# EAGLE board BMS-Shield rev0 (EAGLE 8.0.2)
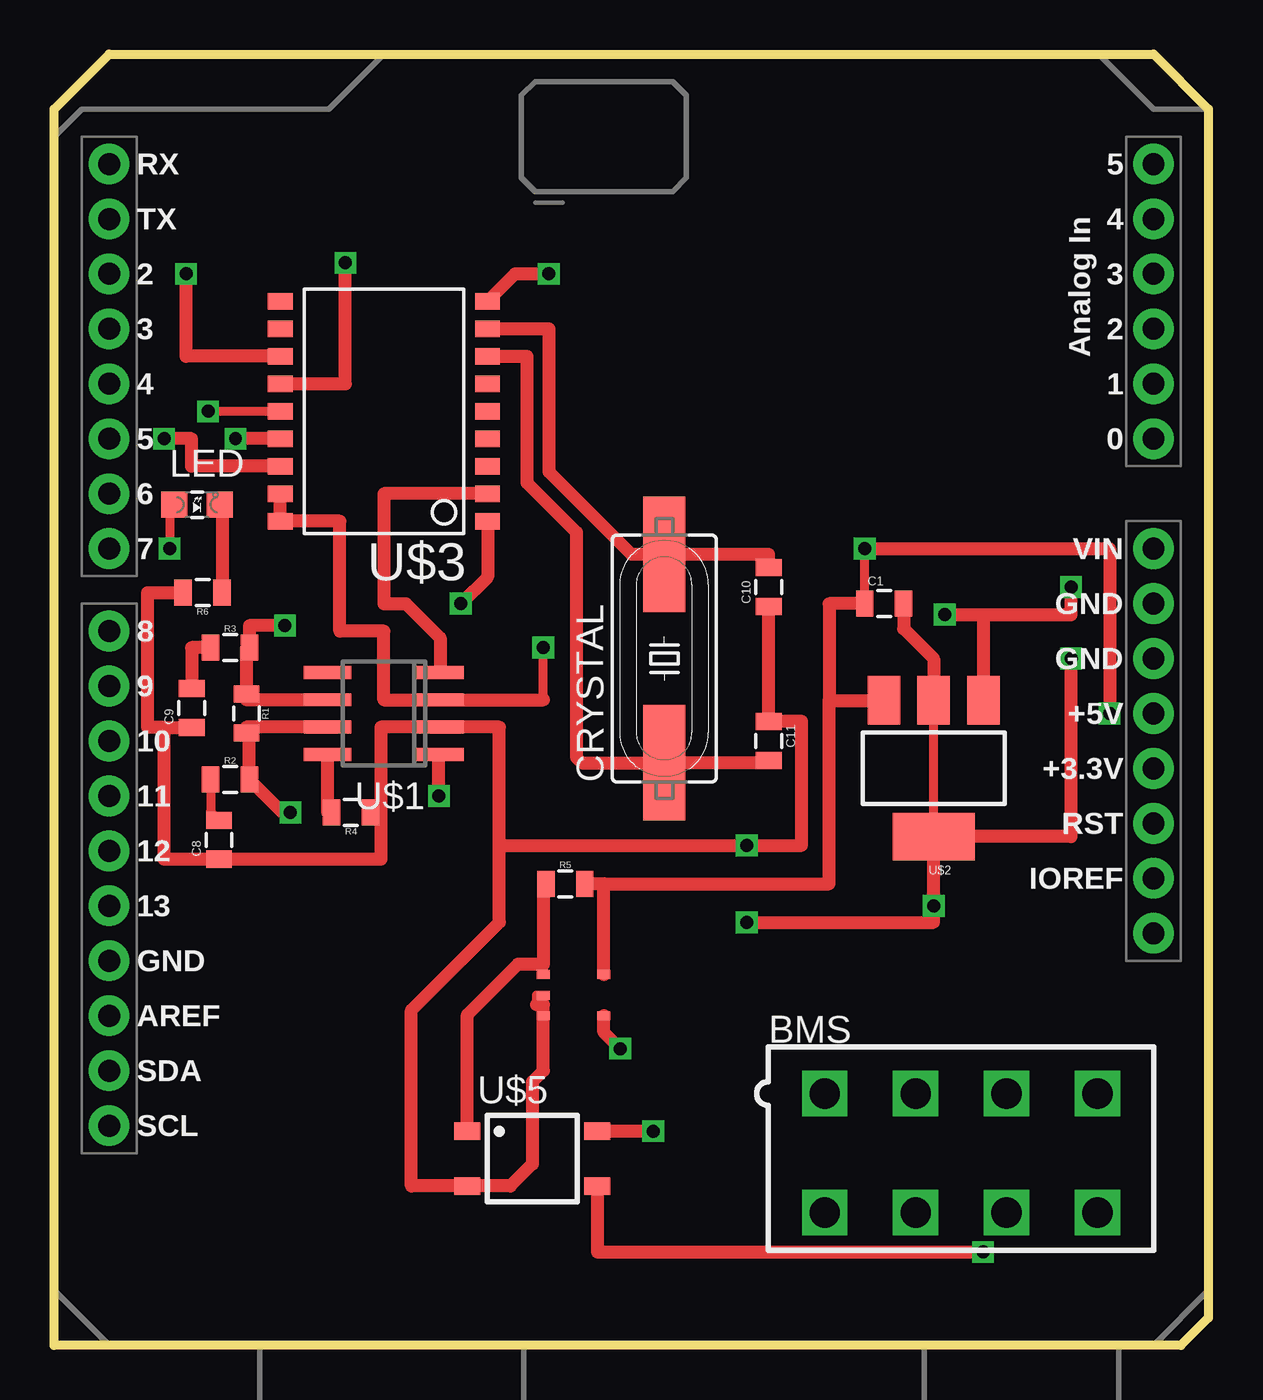
[diagram p0: board, top side]
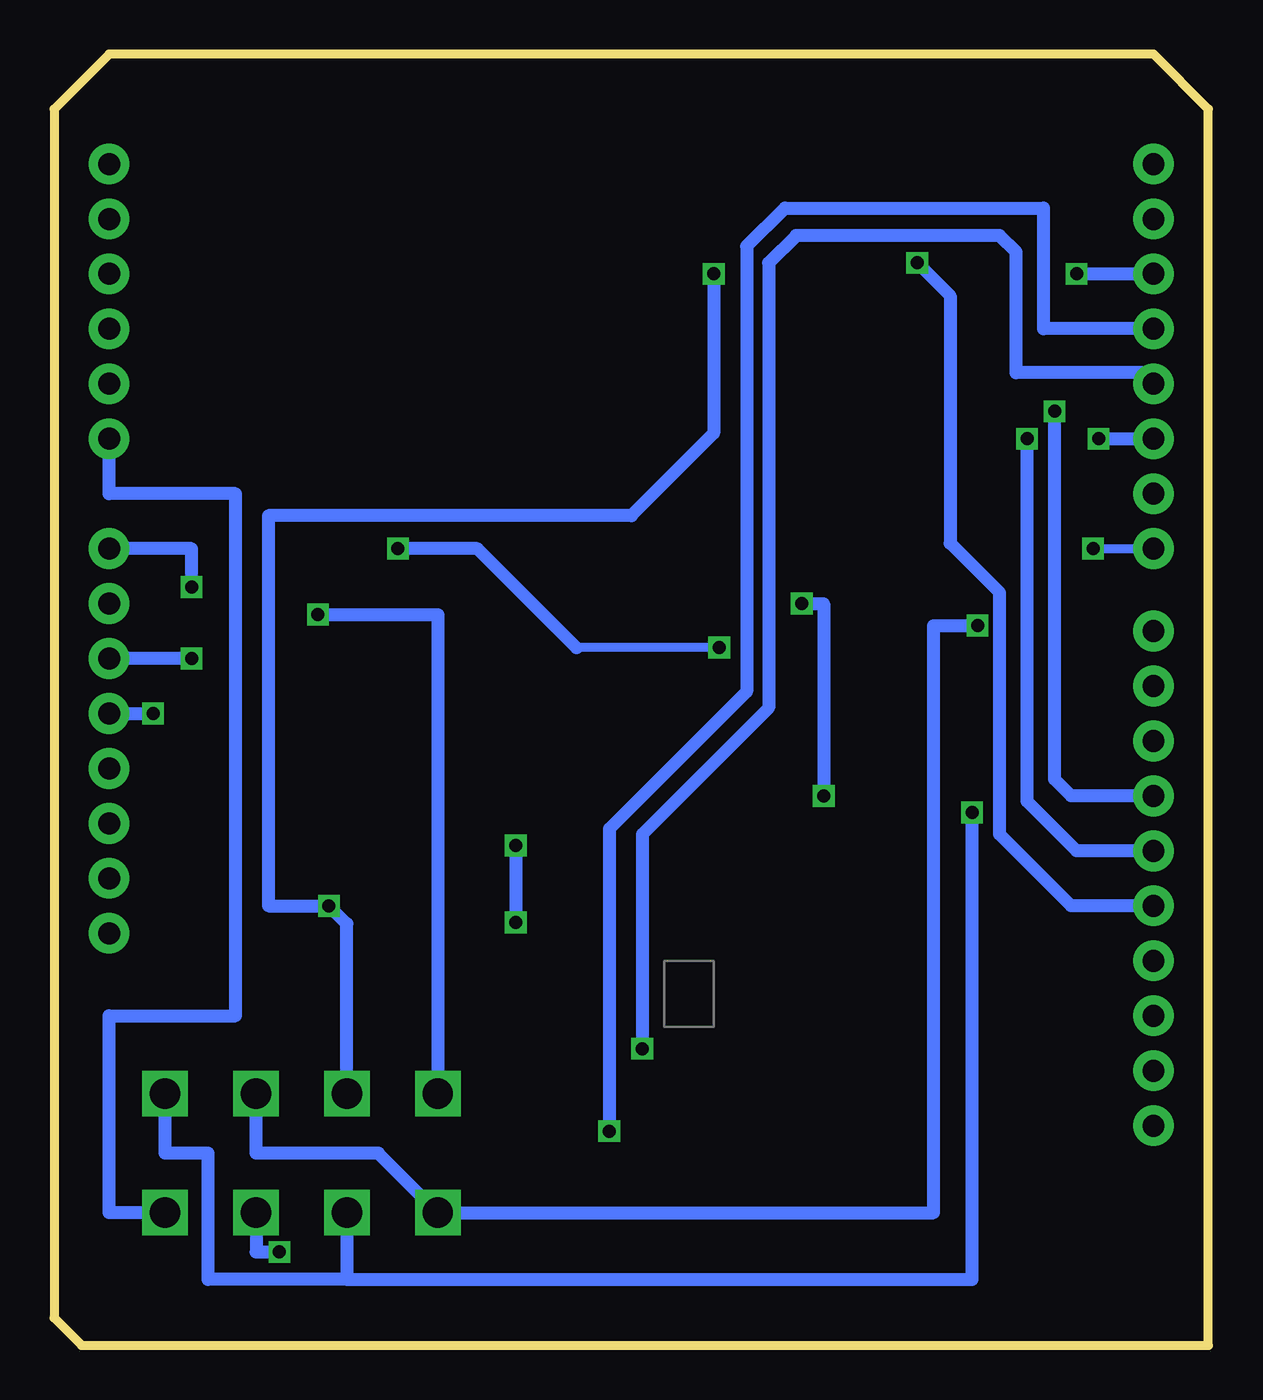
[diagram p1: board, bottom side, seen from below]

Size 53.34 x 59.69 mm. Coordinates in mm from the lower left corner, seen from the top.
Outline: 0,0 0,57.15 2.54,59.69 50.8,59.69 53.34,57.15 53.34,1.27 52.07,0 0,0
Copper layers (1*16): Top 0.035mm / dielectric 1.5mm / Bottom 0.035mm
Design rules "default": minimum track width 10mil, minimum drill 24mil, track to track 8mil, track to pad 8mil, pad to pad 8mil, via to via 8mil, smd to smd 8mil, copper to edge 40mil, drill to drill 8mil, minimum pad ring 10mil, minimum via ring 8mil, stop-mask expansion 4mil, vias tented up to drill 0mil, thermal gap 10mil

## Footprints (pad centres in the part's own frame; a part is rotated, then mirrored left to right if it is on the bottom)
MINIFIT_5566-8 = drill 1.4 square: 1 6.3,-2.75; 2 2.1,-2.75; 3 -2.1,-2.75; 4 -6.3,-2.75; 5 6.3,2.75; 6 2.1,2.75; 7 -2.1,2.75; 8 -6.3,2.75
0805@1 = smd 0.8 x 1.2: 1 -0.9,0; 2 0.9,0
HC49UP = smd 5.334 x 1.93: 1 -4.826,0; 2 4.826,0
UNO_R3_SHIELD = drill 1.016 pad 1.88: 3.3V 50.8,26.67; 5V 50.8,29.21; A0 50.8,41.91; A1 50.8,44.45; A2 50.8,46.99; A3 50.8,49.53; A4 50.8,52.07; A5 50.8,54.61; AREF 2.54,15.24; D2 2.54,49.53; D3 2.54,46.99; D4 2.54,44.45; D5 2.54,41.91; D6 2.54,39.37; D7 2.54,36.83; D8 2.54,33.02; D9 2.54,30.48; D10 2.54,27.94; D11 2.54,25.4; D12 2.54,22.86; D13 2.54,20.32; GND@0 50.8,31.75; GND@1 50.8,34.29; GND@2 2.54,17.78; IOREF 50.8,21.59; NC 50.8,19.05; RES 50.8,24.13; RX 2.54,54.61; SCL 2.54,10.16; SDA 2.54,12.7; TX 2.54,52.07; VIN 50.8,36.83
LED-805 = smd 1.2 x 1.2: A 0,-1.05; C 0,1.05
0805 = smd 0.8 x 1.2: 1 -0.9,0; 2 0.9,0
SOIC-08 = smd 0.6 x 2.2: 1 -1.905,-2.6; 2 -0.635,-2.6; 3 0.635,-2.6; 4 1.905,-2.6; 5 1.905,2.6; 6 0.635,2.6; 7 -0.635,2.6; 8 -1.905,2.6
SOT223 = smd 1.5 x 2.235: 1 -2.3,-3.15; 2 0,-3.15; 3 2.3,-3.15 | smd 3.8 x 2.2: 4 0,3.15
SOIC-18W = smd 0.762 x 1.143: 1 -5.08,-4.788; 2 -3.81,-4.788; 3 -2.54,-4.788; 4 -1.27,-4.788; 5 0,-4.788; 6 1.27,-4.788; 7 2.54,-4.788; 8 3.81,-4.788; 9 5.08,-4.788; 10 5.08,4.788; 11 3.81,4.788; 12 2.54,4.788; 13 1.27,4.788; 14 0,4.788; 15 -1.27,4.788; 16 -2.54,4.788; 17 -3.81,4.788; 18 -5.08,4.788
SOT23-5 = smd 0.61 x 0.406: EN -2.794,0; GND -2.794,0.94; VCC 0,1.905; WDI 0,0; WDO -2.794,1.905
SOP04 = smd 0.8 x 1.2: 1 -1.27,-3; 2 1.27,-3; 3 1.27,3; 4 -1.27,3

## Placement (x,y rotation side)
BMS  [MINIFIT_5566-8]  41.91,8.89 180 top
C1  0.1uF  [0805@1]  38.35,34.29 0 top
C8  560pF  [0805@1]  7.62,23.37 90 top
C9  560pF  [0805@1]  6.35,29.46 90 top
C10  22pF  [0805@1]  33.02,35.05 90 top
C11  22pF  [0805@1]  33.02,27.94 270 top
CRYSTAL  16MHz  [HC49UP]  28.19,31.75 90 top
J1  ARDUINO_R3_SHIELD  [UNO_R3_SHIELD]  0,0 0 top
LED  [LED-805]  6.6,38.86 270 top
R1  120  [0805]  8.89,29.21 270 top
R2  100  [0805]  8.13,26.16 0 top
R3  100  [0805]  8.13,32.26 0 top
R4  4.7k  [0805]  13.72,24.64 180 top
R5  68  [0805]  23.62,21.34 0 top
R6  [0805]  6.86,34.8 180 top
U$1  MCP2551  [SOIC-08]  15.24,29.21 90 top
U$2  [SOT223]  40.64,26.67 180 top
U$3  MCP2515SMD  [SOIC-18W]  15.24,43.18 90 top
U$4  STWD100  [SOT23-5]  25.4,15.24 0 top
U$5  CPC1002N  [SOP04]  22.1,8.64 270 top

## Library data of the parts
BMS = HyTechDevices; OC_FARNELL: unknown; OC_NEWARK: unknown
C1 C8-C11 J1 LED R1-R6 U$1-U$5 = HyTechDevices
CRYSTAL = SparkFun-FreqCtrl

## Nets
12V_SUPPLY: BMS.1 J1.VIN U$2.1
+5V: C1.1 J1.5V R5.2 U$1.3 U$2.3 U$3.17 U$3.18 U$4.VCC
CANH: BMS.4 BMS.6 R1.2 R2.2 U$1.7
CANL: BMS.3 BMS.5 R1.1 R3.2 U$1.6
CS: J1.D5 U$3.16
GND: BMS.2 C1.2 C8.1 C9.1 C10.1 C11.1 J1.GND@0 R4.1 R6.2 U$1.2 U$2.2 U$2.4 U$3.9 U$4.EN U$4.GND U$5.2
N$1: BMS.8 J1.A0
N$2: J1.D12 U$3.15
N$3: J1.D11 U$3.14
N$4: J1.D13 U$3.13
N$5: R5.1 U$4.WDO U$5.1
N$6: J1.D4 U$4.WDI
N$7: J1.D7 LED.A
N$8: BMS.7 U$5.3
N$9: J1.D3 U$5.4
N$10: J1.D2 U$3.12
N$11: C10.2 CRYSTAL.2 U$3.8
N$12: U$1.1 U$3.1
N$13: U$1.4 U$3.2
N$14: C8.2 R2.1
N$15: C11.2 CRYSTAL.1 U$3.7
N$16: R4.2 U$1.8
N$17: C9.2 R3.1
N$18: LED.C R6.1

## Tracks (layer width: path | path; a pad name or v marks a point on that pad's centre or on a via)
12V_SUPPLY  (via drill 0.6)
  Top 0.61: v41.15,33.78 42.94,33.78 | 42.94,33.78 U$2.1 | 42.94,33.78 46.99,33.78 v46.99,35.05
  Bottom 0.61: v41.15,33.78 35.61,33.78 BMS.1 | v46.99,35.05 46.99,36.83 J1.VIN
+5V  (via drill 0.6)
  Top 0.406: U$2.3 38.47,29.82 | C1.1 v37.45,36.83 | 22.61,29.84 v22.61,32.26
  Top 0.61: U$4.VCC 25.4,21.34 | 25.4,21.34 R5.2 | 35.81,29.82 U$2.3 | 25.4,21.34 35.81,21.34 35.81,29.82 | U$3.17 U$3.18 13.21,38.1 13.21,33.02 15.24,33.02 15.24,29.84 U$1.3 22.61,29.84 | C1.1 35.81,34.29 35.81,29.82 | v37.45,36.83 48.77,36.83 v48.77,29.21
  Bottom 0.406: v22.61,32.26 29.21,32.26
  Bottom 0.61: v37.45,36.83 33.78,36.83 29.21,32.26 | J1.5V v48.77,29.21
CANH  (via drill 0.6)
  Top 0.406: 8.89,28.57 R1.2 9.03,28.31 | v10.92,24.64 10.55,24.64
  Top 0.61: U$1.7 8.89,28.57 | 9.03,28.31 R2.2 10.55,24.64
  Bottom 0.61: BMS.6 39.81,3.05 | BMS.4 48.21,8.89 46.23,8.89 46.23,3.05 39.81,3.05 | 39.81,3.05 10.92,3.05 v10.92,24.64
CANL  (via drill 0.6)
  Top 0.406: R1.1 8.89,29.84 | R3.2 8.89,32.26
  Top 0.61: U$1.6 8.89,29.84 | 8.89,32.26 R1.1 | v10.67,33.27 9.03,33.27 R3.2
  Bottom 0.61: BMS.3 44.01,8.89 38.36,8.89 BMS.5 12.7,6.14 12.7,33.27 v10.67,33.27
CS  (via drill 0.6)
  Top 0.61: U$3.16 6.35,40.64 6.35,41.91 v5.08,41.91
  Bottom 0.61: v5.08,41.91 J1.D5
GND  (via drill 0.6)
  Top 0.406: 40.27,29.82 U$2.2 U$2.4 | 15.11,24.64 R4.1 | U$4.GND 22.3,16.18 22.3,15.75
  Top 0.61: v46.99,31.75 46.99,23.52 U$2.4 v40.64,20.32 40.64,19.56 v32,19.56 | C10.1 C11.1 34.54,28.84 34.54,23.11 v32,23.11 20.57,23.11 | 20.57,23.11 20.57,28.57 U$1.2 15.11,28.57 15.11,24.64 15.11,22.47 C8.1 5.08,22.47 5.08,28.56 | 20.57,23.11 20.57,19.56 16.51,15.49 16.51,7.37 U$5.2 21.08,7.37 22.1,8.38 22.1,12.19 22.61,12.7 U$4.EN 22.61,15.75 22.3,15.75 | U$3.9 21.3,49.53 v22.86,49.53 | C1.2 39.25,33.14 40.64,31.75 U$2.2 | R6.2 4.32,34.8 4.32,28.56 5.08,28.56 | 5.08,28.56 C9.1
  Bottom 0.61: v46.99,31.75 J1.GND@0 | BMS.2 39.81,19.49 v40.64,20.32 43.43,20.32 43.43,38.35 26.67,38.35 22.86,42.16 v22.86,49.53 | v32,23.11 v32,19.56
N$1
  Bottom 0.61: BMS.8 50.8,6.14 50.8,15.24 44.96,15.24 44.96,39.37 50.8,39.37 J1.A0
N$2  (via drill 0.6)
  Top 0.61: U$3.15 v8.38,41.91
  Bottom 0.61: v8.38,41.91 8.38,25.15 6.1,22.86 J1.D12
N$3  (via drill 0.6)
  Top 0.406: v7.11,43.18 U$3.14
  Bottom 0.61: v7.11,43.18 7.11,26.16 6.35,25.4 J1.D11
N$4  (via drill 0.6)
  Top 0.61: U$3.13 13.46,44.45 v13.46,50.04
  Bottom 0.61: v13.46,50.04 11.94,48.51 11.94,37.08 9.65,34.8 9.65,23.62 6.35,20.32 J1.D13
N$5
  Top 0.406: 22.61,21.34 R5.1 | 22.61,17.63 U$4.WDO
  Top 0.61: 22.61,21.34 22.61,17.63 21.44,17.63 19.1,15.29 U$5.1
N$6  (via drill 0.6)
  Top 0.61: v26.16,13.72 25.4,14.48 U$4.WDI
  Bottom 0.61: J1.D4 3.05,44.96 8.89,44.96 8.89,50.55 9.65,51.31 19.05,51.31 20.32,50.04 20.32,29.46 26.16,23.62 v26.16,13.72
N$7  (via drill 0.6)
  Top 0.406: LED.A 5.33,38.86 v5.33,36.83
  Bottom 0.406: v5.33,36.83 J1.D7
N$8  (via drill 0.6)
  Top 0.61: U$5.3 25.1,4.32 v42.93,4.32
  Bottom 0.61: BMS.7 44.01,4.32 v42.93,4.32
N$9  (via drill 0.6)
  Top 0.61: v27.69,9.91 U$5.4
  Bottom 0.61: J1.D3 7.62,46.99 7.62,52.58 19.56,52.58 21.34,50.8 21.34,30.23 27.69,23.88 v27.69,9.91
N$10  (via drill 0.6)
  Top 0.61: U$3.12 6.1,45.72 v6.1,49.53
  Bottom 0.61: v6.1,49.53 J1.D2
N$11
  Top 0.61: U$3.8 22.86,46.99 22.86,40.39 26.67,36.58 CRYSTAL.2 33.02,36.58 C10.2
N$12  (via drill 0.6)
  Top 0.406: 20.07,38.1 U$3.1
  Top 0.61: v17.78,25.4 17.78,27.3 U$1.1 | U$3.1 20.03,35.52 v18.8,34.29
  Bottom 0.61: v18.8,34.29 17.78,34.29 v17.78,25.4
N$13
  Top 0.61: U$3.2 15.24,39.37 15.24,34.29 16.26,34.29 17.84,32.71 U$1.4
N$14
  Top 0.406: C8.2 7.23,24.66 R2.1
N$15
  Top 0.406: C11.2 33.02,26.92
  Top 0.61: U$3.7 21.84,45.72 21.84,39.88 24.13,37.59 24.13,27.18 24.38,26.92 CRYSTAL.1 33.02,26.92
N$16
  Top 0.406: R4.2 12.64,24.64
  Top 0.61: 12.64,24.64 U$1.8
N$17
  Top 0.406: 7.23,32.4 R3.1
  Top 0.61: R3.1 6.35,32.26 C9.2
N$18
  Top 0.406: LED.C 7.76,38.86
  Top 0.61: 7.76,38.86 R6.1